# EAGLE board LPRD Valve Control V3 (EAGLE 8.6.0)
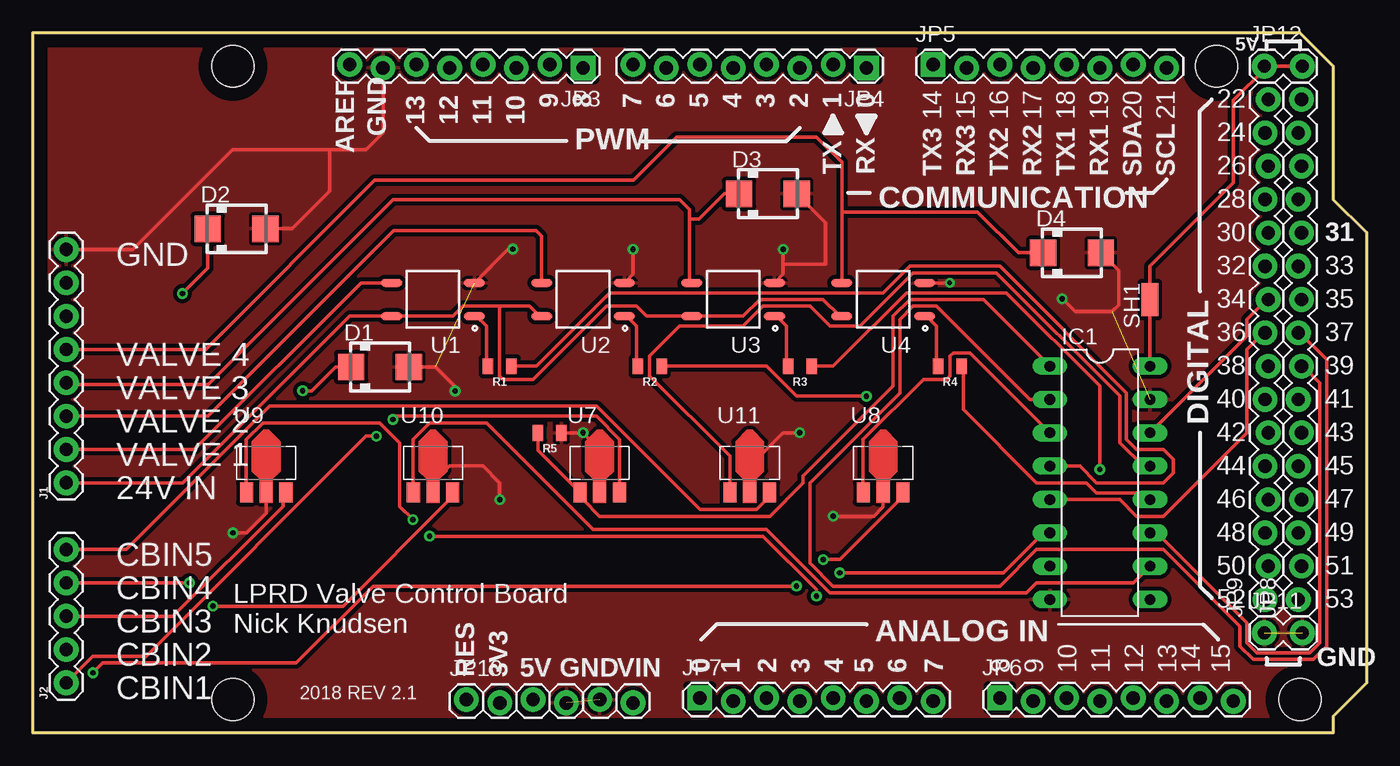
[diagram p0: board, top side]
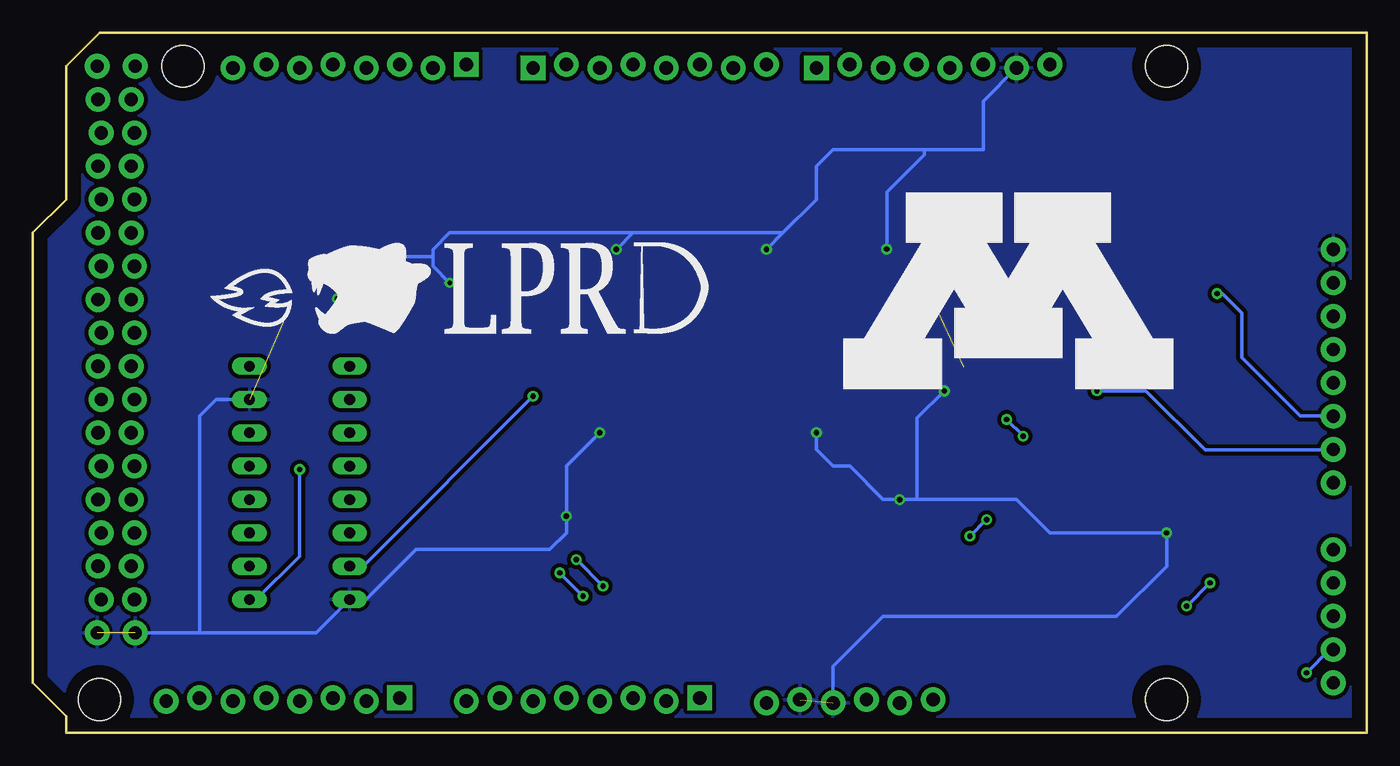
[diagram p1: board, bottom side, seen from below]

Size 101.6 x 53.34 mm. Coordinates in mm from the lower left corner, seen from the top.
Outline: 0,0 99.06,0 99.06,1.27 101.6,3.81 101.6,38.1 99.06,40.64 99.06,50.8 96.52,53.34 0,53.34 0,0
Copper layers (1*16): Top 0.035mm / dielectric 1.5mm / Bottom 0.035mm
Design rules "othermillpro": minimum track width 10mil, minimum drill 16mil, track to track 10mil, track to pad 10mil, pad to pad 10mil, via to via 10mil, smd to smd 6mil, copper to edge 40mil, drill to drill 6mil, minimum pad ring 10mil, minimum via ring 8mil, stop-mask expansion 4mil, vias tented up to drill 0mil, thermal gap 10mil
Holes 3.2 mm at 15.24,50.8 15.24,2.54 90.17,50.8 96.52,2.54

## Footprints (pad centres in the part's own frame; a part is rotated, then mirrored left to right if it is on the bottom)
SMA = smd 2 x 2: A 2.2,0; C -2.2,0
DIL16 = drill 0.813 long: 1 -8.89,-3.81; 2 -6.35,-3.81; 3 -3.81,-3.81; 4 -1.27,-3.81; 5 1.27,-3.81; 6 3.81,-3.81; 7 6.35,-3.81; 8 8.89,-3.81; 9 8.89,3.81; 10 6.35,3.81; 11 3.81,3.81; 12 1.27,3.81; 13 -1.27,3.81; 14 -3.81,3.81; 15 -6.35,3.81; 16 -8.89,3.81
1X08 = drill 1.016 pad 1.88: 1 0,0; 2 2.54,0; 3 5.08,0; 4 7.62,0; 5 10.16,0; 6 12.7,0; 7 15.24,0; 8 17.78,0
1X05 = drill 1.016 pad 1.88: 1 0,0; 2 2.54,0; 3 5.08,0; 4 7.62,0; 5 10.16,0
1X08_LOCK = drill 1.016 pad 1.88 square: 1 0,0.127 | drill 1.016 pad 1.88: 2 2.54,-0.127; 3 5.08,0.127; 4 7.62,-0.127; 5 10.16,0.127; 6 12.7,-0.127; 7 15.24,0.127; 8 17.78,-0.127
1X16_LOCK = drill 1.016 pad 1.88: 1 0,0.127; 2 2.54,-0.127; 3 5.08,0.127; 4 7.62,-0.127; 5 10.16,0.127; 6 12.7,-0.127; 7 15.24,0.127; 8 17.78,-0.127; 9 20.32,0.127; 10 22.86,-0.127; 11 25.4,0.127; 12 27.94,-0.127; 13 30.48,0.127; 14 33.02,-0.127; 15 35.56,0.127; 16 38.1,-0.127
1X06_LOCK = drill 1.016 pad 1.88: 1 0,0; 2 2.54,-0.254; 3 5.08,0; 4 7.62,-0.254; 5 10.16,0; 6 12.7,-0.254
1X02_LOCK = drill 1.016 pad 1.88: 1 -0.178,0; 2 2.718,0
0805 = smd 0.8 x 1.2: 1 -0.9,0; 2 0.9,0
SHORT_TOP-50 = smd 1.27 x 1.27: 1 0.635,0; 2 -0.635,0
SOIC254P680X220-4N = smd 1.6 x 0.6: 1 -3.15,1.27; 2 -3.15,-1.27; 3 3.15,-1.27; 4 3.15,1.27
VREG_TL431BQPK = smd 1 x 1.5: 1 -1.5,-2; 2 0,-2; 3 1.5,-2

## Placement (x,y rotation side)
D1  SMAJ58A  [SMA]  26.44,27.88 0 top
D2  SMAJ58A  [SMA]  15.52,38.4 0 top
D3  SMAJ58A  [SMA]  55.98,41.07 0 top
D4  SMAJ58A  [SMA]  79.16,36.58 0 top
IC1  74LS157N  [DIL16]  81.28,19.05 270 top
J1  [1X08]  2.54,19.05 90 top
J2  [1X05]  2.54,3.81 90 top
JP3  [1X08_LOCK]  41.91,50.8 180 top
JP4  [1X08_LOCK]  63.5,50.8 180 top
JP5  [1X08_LOCK]  68.58,50.8 0 top
JP6  [1X08_LOCK]  73.66,2.54 0 top
JP7  [1X08_LOCK]  50.8,2.54 0 top
JP8  M16LOCK  [1X16_LOCK]  96.52,10.16 90 top
JP9  M16LOCK  [1X16_LOCK]  93.98,10.16 90 top
JP10  [1X06_LOCK]  33.02,2.54 0 top
JP11  [1X02_LOCK]  93.98,7.62 0 top
JP12  [1X02_LOCK]  93.98,50.8 0 top
R1  2k  [0805]  35.56,27.94 180 top
R2  2k  [0805]  46.99,27.94 180 top
R3  2k  [0805]  58.42,27.94 180 top
R4  2k  [0805]  69.85,27.94 180 top
R5  1M  [0805]  39.37,22.86 180 top
SH1  SHORTT5  [SHORT_TOP-50]  85.09,33.02 270 top
U1  AQY225R2SZ  [SOIC254P680X220-4N]  30.48,33.02 180 top
U2  AQY225R2SZ  [SOIC254P680X220-4N]  41.91,33.02 180 top
U3  AQY225R2SZ  [SOIC254P680X220-4N]  53.34,33.02 180 top
U4  AQY225R2SZ  [SOIC254P680X220-4N]  64.77,33.02 180 top
U7  TL431BQPK  [VREG_TL431BQPK]  43.18,20.32 0 top
U8  TL431BQPK  [VREG_TL431BQPK]  64.77,20.32 0 top
U9  TL431BQPK  [VREG_TL431BQPK]  17.78,20.32 0 top
U10  TL431BQPK  [VREG_TL431BQPK]  30.48,20.32 0 top
U11  TL431BQPK  [VREG_TL431BQPK]  54.61,20.32 0 top
U$1  [UMNLOGO]  14.61,26.12 0 top
U$2  [LPRDLOGO]  49.11,27.13 0 top

## Library data of the parts
D1-D4 = SMAJ58A; DESCRIPTION: TVS DIODE 58VWM 93.6VC DO214AC; DIGI-KEY_PART_NUMBER: SMAJ58ABTR-ND; DIGI-KEY_PURCHASE_URL: https://www.digikey.com/product-detail/en/bourns-inc/SMAJ58A/SMAJ58ABTR-ND/2254713?WT.z_cid=ref_snapeda&utm_source=snapeda&utm_medium=aggregator&utm_campaign=buynow; MF: Bourns; MP: SMAJ58A; PACKAGE: DO-214AC-214 Taiwan Semiconductor
IC1 = 74xx-us
J1 = SparkFun-Connectors; PROD_ID: CONN-08438
J2 = SparkFun-Connectors
JP3-JP12 = SparkFun
R1-R5 = SparkFun-Resistors
SH1 = shorts; BOM: no
U1-U4 = 4SOP; DESCRIPTION: Relay Opto Ac/Dc 80v 150ma 4-Sop; DIGI-KEY_PART_NUMBER: AQY225R2SZ-ND; DIGI-KEY_PURCHASE_URL: https://www.digikey.com/product-detail/en/panasonic-electric-works/AQY225R2SZ/AQY225R2SZ-ND/4757870?WT.z_cid=ref_snapeda; MF: Panasonic; MP: AQY225R2SZ; PACKAGE: SOP-4 Panasonic
U7-U11 = Vreg; AVAILABILITY: Good; DESCRIPTION: V-Ref Adjustable 2.495V to 36V 100mA 4-Pin(3+Tab) SOT-89 T/R; MF: Texas Instruments; MP: TL431BQPK; PACKAGE: SOT-89-3 Texas Instruments; PRICE: 0.33 USD
U$1 = UMNLogo
U$2 = LPRDLogo

## Nets
3.3: JP10.2
5V: JP10.3
5V@1: JP12.1 JP12.2 SH1.2
A0: JP7.1
A1: JP7.2
A2: JP7.3
A3: JP7.4
A4: JP7.5
A5: JP7.6
A6: JP7.7
A7: JP7.8
A8: JP6.1
A9: JP6.2
A10: JP6.3
A11: JP6.4
A12: JP6.5
A13: JP6.6
A14: JP6.7
A15: JP6.8
AREF: JP3.8
CBIN1: J2.1 U7.3
CBIN2: J2.2 U8.3
CBIN3: J2.3 U9.3
CBIN4: J2.4 U10.3
CBIN5: J2.5 U11.3
CBOUT2: IC1.3 U8.1
CBOUT3: IC1.6 U9.1
CBOUT4: IC1.10 U10.1
CBOUT5: IC1.13 U11.1
D2: JP4.3
D3: JP4.4
D4: JP4.5
D5: JP4.6
D6: JP4.7
D7: JP4.8
D8: JP3.1
D9: JP3.2
D10: JP3.3
D11: JP3.4
D12: JP3.5
D13: JP3.6
D14: JP5.8
D15: JP5.7
D16: JP5.6
D17: JP5.5
D18: JP5.4
D19: JP5.3
D22: JP9.1
D23: JP8.16
D24: JP9.2
D25: JP8.15
D26: JP9.3
D27: JP8.14
D28: JP9.4
D29: JP8.13
D30: JP9.5
D31: JP8.12
D32: JP9.6
D33: JP8.11
D34: JP9.7
D35: JP8.10
D36: JP9.8
D37: IC1.2 JP8.9
D38: IC1.5 JP9.9
D39: IC1.11 JP8.8
D40: IC1.14 JP9.10
D41: JP8.7
D42: JP9.11
D43: JP8.6
D44: JP9.12
D45: JP8.5
D46: JP9.13
D47: JP8.4
D48: JP9.14
D49: JP8.3
D50: JP9.15
D51: JP8.2
D52: JP9.16
D53: JP8.1
GND: D1.A D2.A D3.A D4.A IC1.8 IC1.15 J1.8 JP3.7 JP10.4 JP10.5 JP11.1 JP11.2 R5.1 U1.2 U2.2 U3.2 U4.2 U7.2 U8.2 U9.2 U10.2 U11.2
N$1: R1.2 U1.1
N$2: R2.2 U2.1
N$3: R3.2 U3.1
N$4: R4.2 U4.1
N$7: J1.1 U1.4 U2.4 U3.4 U4.4
N$9: D1.C J1.2 U1.3
N$10: D2.C J1.3 U2.3
N$11: D3.C J1.4 U3.3
N$12: D4.C J1.5 U4.3
N$18: IC1.4 R1.1
N$19: IC1.7 R2.1
N$20: IC1.9 R3.1
N$21: IC1.12 R4.1
N$22: IC1.1 R5.2 U7.1
RES: JP10.1
RX0: JP4.1
SCL: JP5.1
SDA: JP5.2
TX1: JP4.2
VCC: IC1.16 SH1.1
VIN: JP10.6

## Tracks (layer width: path | path; a pad name or v marks a point on that pad's centre or on a via)
5V@1
  Top 0.254: JP12.2 93.98,50.8 | 93.98,50.8 JP12.1 | SH1.2 85.09,35.56 91.44,41.91 91.44,48.19 93.98,50.73 93.98,50.8
CBIN1  (via drill 0.41)
  Top 0.254: v27.43,23.88 27.69,24.13 42.93,24.13 44.7,22.35 44.7,18.54 U7.3 | v26.16,22.61 25.4,22.61 8.64,5.84 4.57,5.84 J2.1
  Bottom 0.254: v26.16,22.61 v27.43,23.88
CBIN2  (via drill 0.41)
  Top 0.254: v60.2,13.21 61.47,13.21 66.04,17.78 66.04,18.29 U8.3 | v58.17,11.18 25.91,11.18 20.07,5.33 5.33,5.33 v4.57,4.57
  Bottom 0.254: v58.17,11.18 v60.2,13.21 | v4.57,4.57 2.79,6.35 J2.2
CBIN3
  Top 0.254: J2.3 10.67,8.89 19.05,17.27 19.05,18.29 U9.3
CBIN4  (via drill 0.41)
  Top 0.254: v13.72,9.65 23.62,9.65 31.75,17.78 31.75,18.29 U10.3 | J2.4 v11.94,11.43
  Bottom 0.254: v11.94,11.43 v13.72,9.65
CBIN5
  Top 0.254: J2.5 7.11,13.97 18.03,24.89 42.93,24.89 50.8,17.02 55.12,17.02 55.88,17.78 55.88,18.29 U11.3
CBOUT2
  Top 0.254: IC1.3 71.37,28.96 70.1,28.96 69.85,28.7 69.85,27.18 69.6,26.92 67.82,26.92 63.25,22.35 63.25,18.54 U8.1
CBOUT3  (via drill 0.41)
  Top 0.254: v28.96,16.26 27.94,17.27 27.94,22.1 26.42,23.62 17.53,23.62 16.26,22.35 16.26,18.54 U9.1 | v30.23,14.99 55.63,14.99 59.69,10.92 v59.69,10.41 | v61.47,12.19 73.91,12.19 76.96,15.24 IC1.6
  Bottom 0.254: v30.23,14.99 v28.96,16.26 | v61.47,12.19 v59.69,10.41
CBOUT4
  Top 0.254: IC1.10 83.82,11.43 76.45,11.43 75.69,10.67 60.71,10.67 55.88,15.49 42.67,15.49 34.54,23.62 30.23,23.62 28.96,22.35 28.96,18.54 U10.1
CBOUT5
  Top 0.254: IC1.13 84.58,20.32 82.8,22.1 82.8,25.65 73.41,35.05 67.06,35.05 62.99,30.99 60.71,30.99 59.18,32.51 55.63,32.51 54.1,30.99 49.28,30.99 46.99,28.7 46.99,27.18 53.09,21.08 53.09,18.54 U11.1
D37
  Top 0.254: IC1.2 75.95,25.4 68.83,32.51 67.06,32.51 66.04,31.5 66.04,25.91 59.18,19.05 59.18,12.95 60.96,11.18 73.66,11.18 76.45,13.97 86.11,13.97 91.95,8.13 91.95,6.6 92.96,5.59 97.54,5.59 98.55,6.6 98.55,28.45 96.52,30.48 JP8.9
D38
  Top 0.254: IC1.5 82.8,17.78 84.07,16.51 86.11,16.51 92.46,22.86 92.46,29.21 93.73,30.48 JP9.9
D39
  Top 0.254: IC1.11 85.6,15.24 92.46,8.38 92.46,6.86 93.22,6.1 97.28,6.1 98.04,6.86 98.04,26.67 96.77,27.94 JP8.8
D40
  Top 0.254: IC1.14 92.46,30.23 92.46,31.5 93.98,33.02 JP9.10
GND  (via drill 0.35, 0.41)  (4 unrouted)
  Top 0.254: J1.8 7.62,36.83 15.24,44.45 22.62,44.45 | 22.62,44.45 25.4,44.45 26.67,45.72 JP3.7 | U9.2 17.78,16.72 16.3,15.24 v15.24,15.24 | v35.56,17.78 35.56,19.05 34.29,20.32 31.75,20.32 30.48,19.05 U10.2 | R5.1 v41.91,22.86 43.18,21.59 U7.2 | v58.42,22.86 57.15,22.86 54.61,20.32 U11.2 | v60.96,16.51 64.05,16.51 64.77,17.23 U8.2 | U2.2 45.72,34.95 v45.72,36.83 | 57.15,35.67 57.15,34.95 U3.2 | 57.15,35.67 v57.15,36.83 | U4.2 v69.85,34.29 | D2.A 19.74,38.41 22.62,41.29 22.62,44.45 | D3.A 60.38,38.88 60.38,35.74 57.21,35.74 57.15,35.67 | D1.A 30.7,27.88 32.17,26.4 v32.17,26.05 | D4.A 82.72,35.22 82.72,32.61 82.19,32.09 79.4,32.09 v78.41,33.08 | v36.55,36.85 36.2,36.85 U1.2
  Bottom 0.254: v41.91,22.86 41.91,21.59 40.64,20.32 39.37,20.32 36.83,17.78 v35.56,17.78 34.24,17.78 | 34.24,17.78 26.67,17.78 24.13,15.24 v15.24,15.24 15.24,12.7 19.05,8.89 36.83,8.89 40.64,5.08 JP10.4 | v58.42,22.86 60.96,20.32 v60.96,16.51 60.96,15.24 62.23,13.97 72.39,13.97 76.2,10.16 IC1.8 80.01,7.62 88.9,7.62 | 88.9,7.62 JP11.1 | IC1.15 87.63,25.4 88.9,24.13 88.9,7.62 | JP3.7 29.21,48.13 29.21,44.45 33.68,44.45 | 33.68,44.45 40.64,44.45 41.91,43.18 41.91,40.64 44.45,38.1 | v45.72,36.83 44.45,38.1 | v57.15,36.83 55.88,38.1 | 55.88,38.1 44.45,38.1 | v69.85,34.29 71.12,35.56 71.12,36.31 | 71.12,36.31 71.12,36.83 69.85,38.1 55.88,38.1 | v32.17,26.05 34.24,23.98 34.24,17.78 | v78.41,33.08 77.66,33.08 74.44,36.31 71.12,36.31 | v36.55,36.85 36.55,41.2 33.68,44.07 33.68,44.45
  pour Bottom (isolate 0.305): 0,0 99.06,0 99.06,1.27 101.6,3.81 101.6,38.1 99.06,40.64 99.06,50.8 96.52,53.34 0,53.34
  pour Top (isolate 0.305): 0,0 99.06,0 99.06,1.27 101.6,3.81 101.6,38.1 99.06,40.64 99.06,50.8 96.52,53.34 0,53.34
N$1
  Top 0.254: R1.2 34.54,27.94 34.54,30.99 33.78,31.75 U1.1
N$2
  Top 0.254: R2.2 45.97,27.94 45.97,30.99 45.21,31.75 U2.1
N$3
  Top 0.254: R3.2 57.4,27.94 57.4,30.99 56.64,31.75 U3.1
N$4
  Top 0.254: R4.2 68.83,27.94 68.83,30.99 68.07,31.75 U4.1
N$7
  Top 0.254: U4.4 61.47,31.75 60.2,33.02 55.37,33.02 54.1,31.75 U3.4 46.74,31.75 45.97,32.51 43.69,32.51 38.1,26.92 35.81,26.92 35.56,27.18 35.56,32.51 | 35.56,32.51 37.85,32.51 38.61,31.75 U2.4 | 35.56,32.51 32.77,32.51 32,31.75 U1.4 24.13,31.75 11.43,19.05 J1.1
N$9  (via drill 0.41)
  Top 0.254: U1.3 25.01,34.29 12.31,21.59 J1.2 | D1.C 23.05,27.88 21.23,26.06 v20.55,26.06
  Bottom 0.254: v20.55,26.06 16.82,26.06 12.31,21.55 2.58,21.55 J1.2
N$10  (via drill 0.41)
  Top 0.254: D2.C 13.32,35.41 v11.39,33.48 | U2.3 38.76,37.83 38.33,38.27 27.5,38.27 13.36,24.13 J1.3
  Bottom 0.254: J1.3 5.04,24.13 9.5,28.59 9.5,31.99 10.99,33.48 v11.39,33.48
N$11
  Top 0.254: 50.04,39.14 50.04,39.88 49.28,40.64 27.45,40.64 13.35,26.54 2.67,26.54 J1.4 | 50.04,39.14 50.04,34.29 U3.3 | D3.C 52.67,41.07 50.74,39.14 50.04,39.14
N$12
  Top 0.254: U4.3 61.62,39.69 | 61.62,39.69 61.62,43.47 59.69,45.4 49.05,45.4 45.74,42.1 26.05,42.1 13.16,29.21 J1.5 | 61.62,39.69 71.96,39.69 75.07,36.58 D4.C
N$18
  Top 0.254: R1.1 38.35,27.94 43.94,33.53 64.77,33.53 66.8,35.56 73.66,35.56 83.31,25.91 83.31,22.35 84.07,21.59 86.11,21.59 86.87,20.83 86.87,19.81 86.11,19.05 81.03,19.05 79.76,20.32 IC1.4
N$19  (via drill 0.41)
  Top 0.254: R2.1 55.88,27.94 58.17,25.65 v63.5,25.65
  Bottom 0.254: v63.5,25.65 76.45,12.7 IC1.7
N$20  (via drill 0.41)
  Top 0.254: R3.1 60.96,27.94 66.55,33.53 74.17,33.53 81.28,26.42 v81.28,20.07
  Bottom 0.254: v81.28,20.07 81.28,13.46 84.58,10.16 IC1.9
N$21
  Top 0.254: IC1.12 84.58,18.29 81.03,18.29 80.26,19.05 76.45,19.05 70.87,24.64 70.87,27.94 R4.1
N$22
  Top 0.254: IC1.1 72.39,33.02 66.8,33.02 65.53,31.75 65.53,26.42 58.67,19.56 58.67,19.05 56.13,16.51 43.18,16.51 41.91,17.78 41.91,18.29 U7.1 38.47,21.53 R5.2
VCC
  Top 0.254: IC1.16 SH1.1

## Text on the board
tPlace: 5V | 9 | 8 | 7 | 6 | 5 | 4 | 3 | 2 | 1 | 0 | 22 | 14 | 15 | 16 | 17 | 18 | 19 | 20 | 21 | 13 | 12 | 11 | 10 | GND | 24 | AREF | PWM | TX | RX | 26 | TX3 | RX3 | TX2 | RX2 | TX1 | RX1 | SDA | SCL | COMMUNICATION | 28 | 30 | 31 | GND | 32 | 33 | 34 | 35 | 36 | 37 | VALVE 4 | 38 | 39 | VALVE 3 | 40 | 41 | VALVE 2 | DIGITAL | 42 | 43 | VALVE 1 | 44 | 45 | 24V IN | 46 | 47 | 48 | 49 | CBIN5 | 50 | 51 | CBIN4 | 52 | 53 | CBIN3 | LPRD Valve Control Board / Nick Knudsen | ANALOG IN | CBIN2 | 0 | 1 | 2 | 3 | 4 | 5 | 6 | 7 | 8 | 9 | 10 | 11 | 12 | 13 | 14 | 15 | GND | RES | 3V3 | 5V | GND | VIN | CBIN1 | 2018 REV 2.1